# Altium PCB PCB1.PcbDoc
Units mil, origin at the board's own origin, x right, y up, seen from the top; angles counter-clockwise.
Board outline 2040 x 2465 mil, 2 copper layers (Top Layer, Bottom Layer); 48 components, 35 nets, 139 pads, 13 vias.
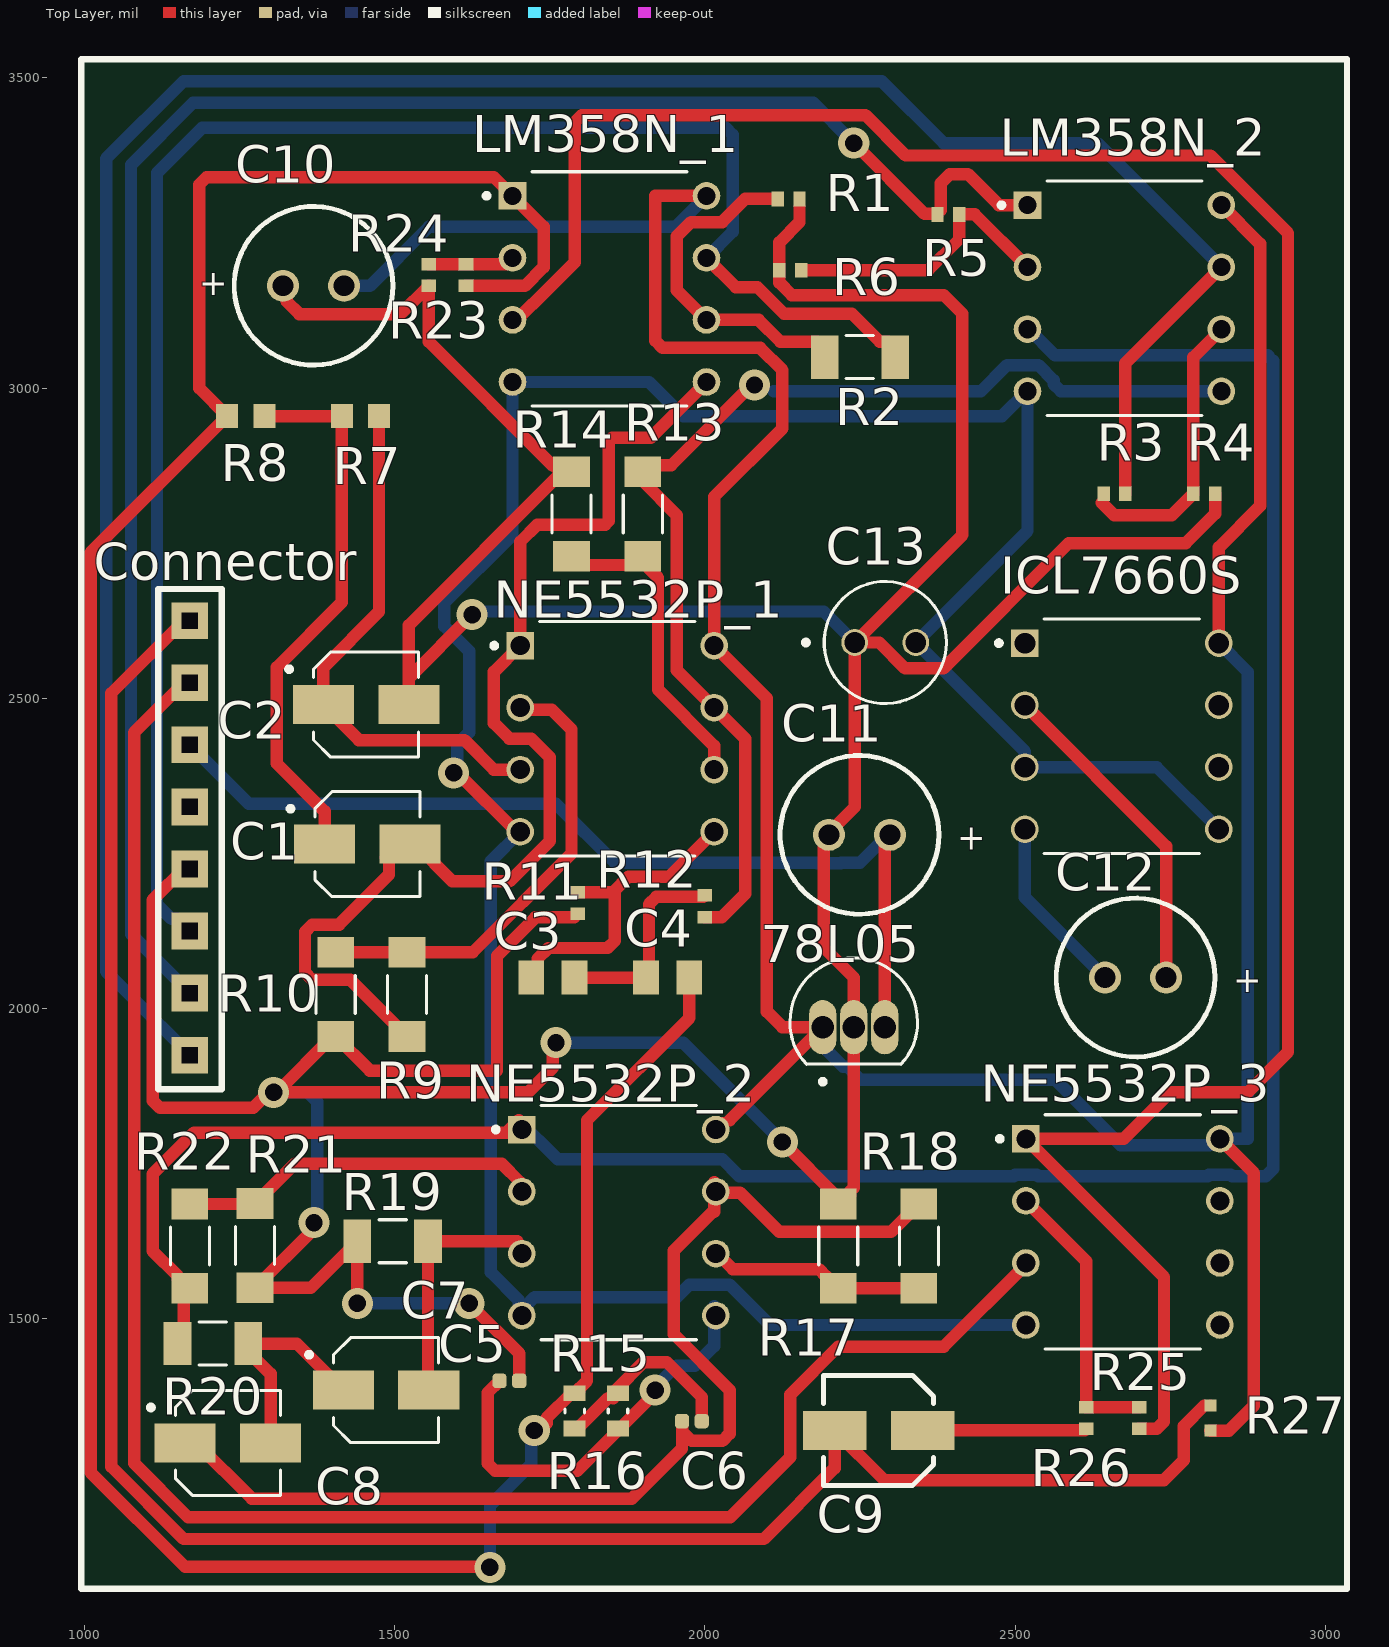
[diagram p0: Top Layer view]
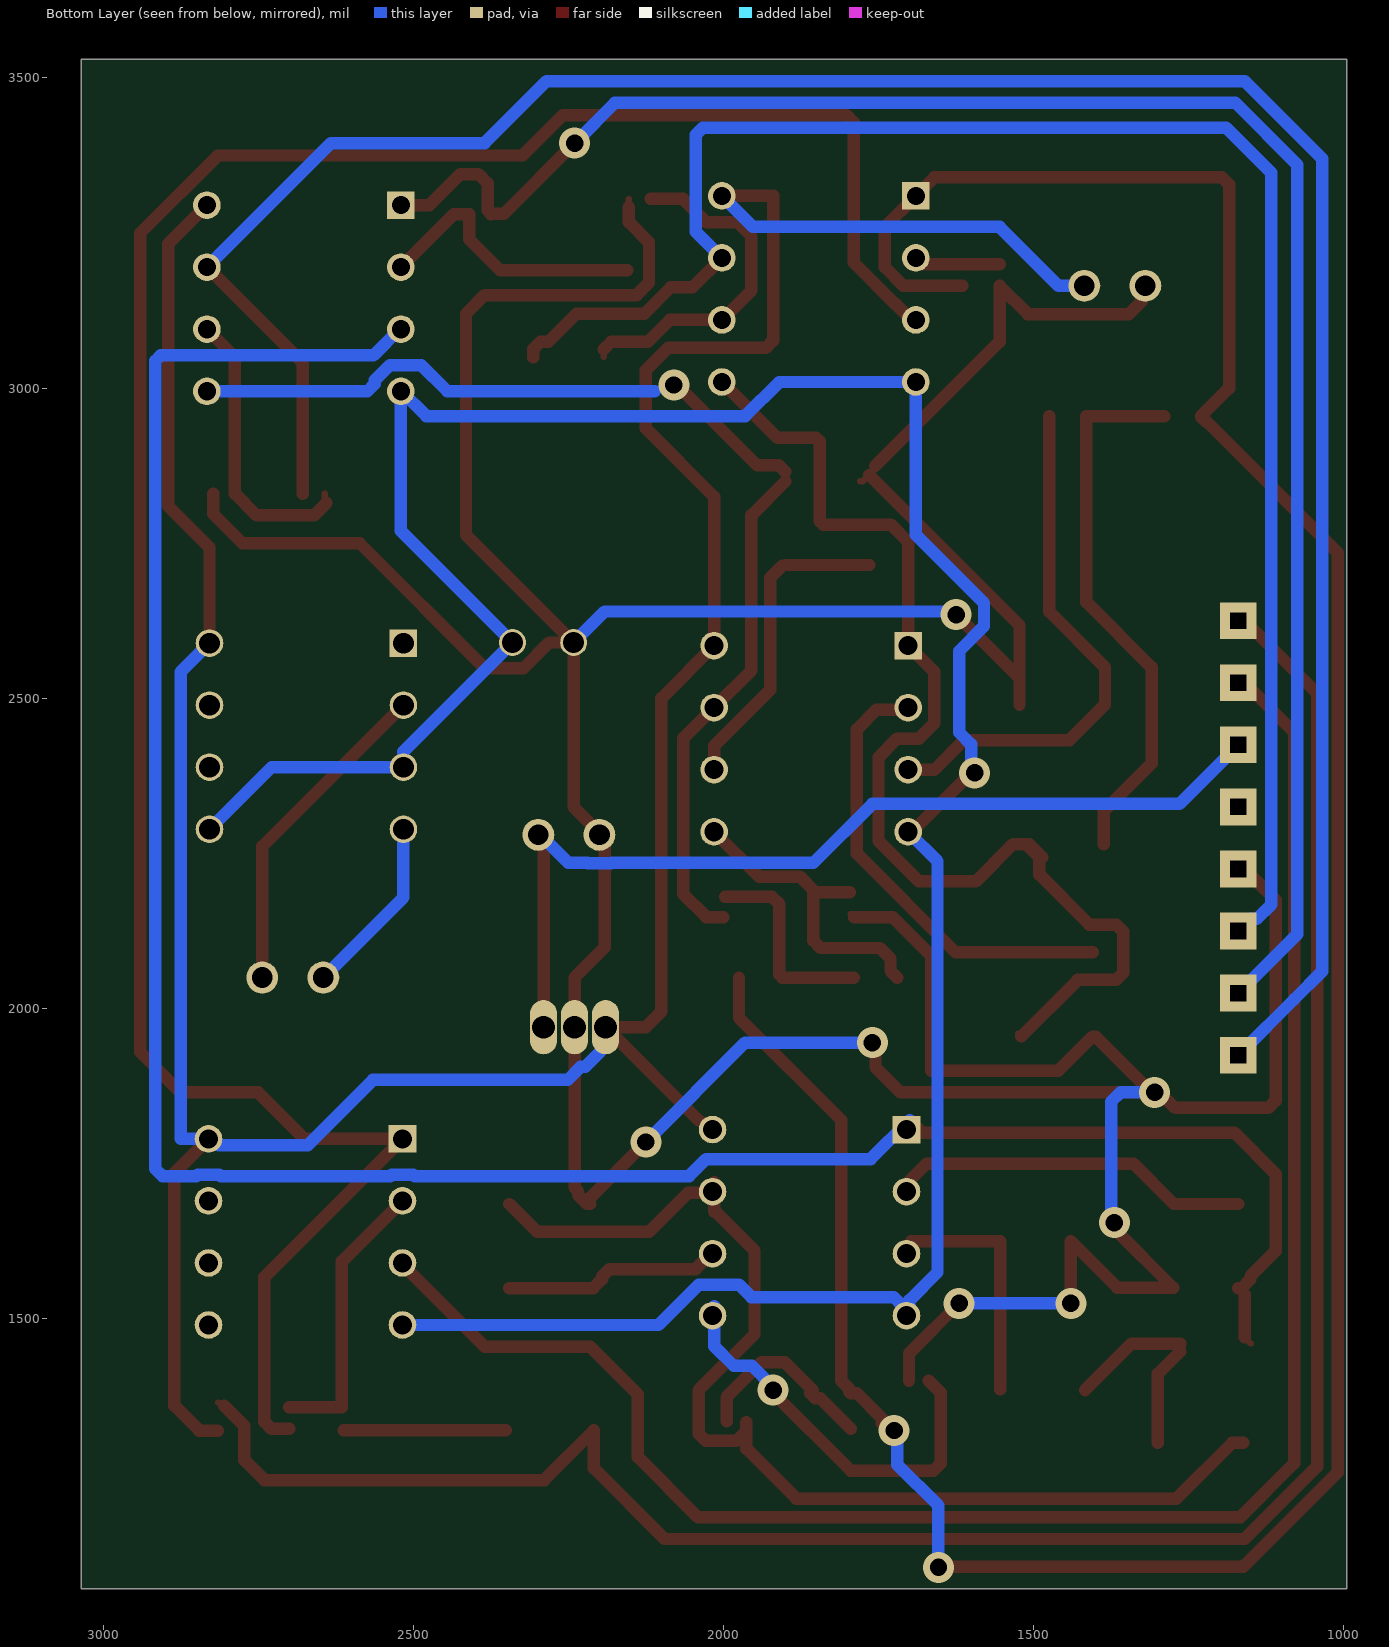
[diagram p1: Bottom Layer view, seen from below]

## Layer stack, top to bottom
Top Solder: solder mask 0.4, Solder Resist, Dk 3.5
Top Layer: signal copper 1.4
Dielectric 1: dielectric 12.6, FR-4, Dk 4.8
Bottom Layer: signal copper 1.4
Bottom Solder: solder mask 0.4, Solder Resist, Dk 3.5

## Board outline
995,1065 3035,1065 3035,3530 995,3530

## Design rules (kind name [scope] priority, off if disabled: settings)
Clearance [All] p1: gap=10 ignorepadtopadclearanceinfootprint=FALSE except(0: Arc-Hole Track-Hole SMDPad-Hole THPad-Hole Via-Hole Fill-Hole Poly-Hole Region-Hole Text-Hole; 6.2: THPad-THPad; 8: SMDPad-SMDPad)
MinimumSolderMaskSliver [All] p1: minsoldermaskwidth=0.6
PolygonConnect [All] p1: connectstyle=Relief reliefconductorwidth=10 reliefentries=4 polygonreliefangle="90 Angle" airgapwidth=10
RoutingVias [All] p1: holewidth=28 width=50 viastyle="Through Hole" minholewidth=28 minwidth=50 maxholewidth=28 maxwidth=50
SilkToSilkClearance [All] p1: silktosilkclearance=0
SilkToSolderMaskClearance [IsPad] p1: minsilkscreentomaskgap=6 clearancetoexposedcopper=TRUE
SolderMaskExpansion [All] p1: expansion=4 istentingtop=FALSE
Width [All] p1: maxlimit=30 minlimit=10 preferedwidth=10 minimp=50.000000 maximp=50.000000 favimp=50.000000
27 further rules are at their usual default settings.

## Components (designator, comment, footprint, x,y, rotation, side; value= is the part's Value field where it differs from the comment)
78L05 "" 78L05 2190,1970 r0 top
C1 "2.2u" 2.2u#1 1691.1,2270 r0 top
C2 "2.2u" 2.2u#1 1688.9,2495 r0 top
C3 "4.7n" 4.7n 1750,2050 r0 top
C4 "4.7n" 4.7n 1935,2050 r0 top
C5 "3.3n" 3.3n 1685,1400 r0 top
C6 "3.3n" 3.3n 1979.06,1335 r0 top
C7 "2.2u" 2.2u#1 1721.1,1390 r0 top
C8 "2.2u" 2.2u#1 1466.1,1305 r0 top
C9 "1u" 1u 2275,1320 r0 top
C10 "470U" 470u 1418.43,3165 r0 top
C11 "2.2u" 2.2u#2 2298.43,2280 r0 top
C12 "470U" 470u 2743.43,2050 r0 top
C13 "10U" 10u 2241.57,2590 r0 top
Connector "" Connector 1170,1880 r0 top
ICL7660S "" ICL7660S 2665,2435 r0 top
LM358N_1 "" LM358N 2186.3,3145 r0 top
LM358N_2 "" LM358N 3016.3,3130 r0 top
NE5532P_1 "" NE5532P 14423.7,-210 r0 top
NE5532P_2 "" NE5532P 14426.3,-990 r0 top
NE5532P_3 "" NE5532P 15238.7,-1005 r0 top
R1 "10k" 10k 2135,3305 r0 top
R2 "470k" 470k 2255,3050 r0 top
R3 "100k" 100k 2660,2830 r0 top
R4 "10k" 10k 2805,2830 r0 top
R5 "100k" 100k 2392.2,3280 r0 top
R6 "10k" 10k 2137.52,3190 r0 top
R7 "270" 270 1409.92,2120 r0 top
R8 "270" 270 1224.92,2120 r0 top
R9 "5.1k" 5.1k 8205,18822.91 r90 top
R10 "5.1k" 5.1k 8090,18822.91 r90 top
R11 "10k" 10k 1795,2170 r90 top
R12 "10k" 10k 2000,2165 r90 top
R13 "5.1k" 5.1k 8585,19597.09 r90 top
R14 "5.1k" 5.1k 8470,19597.09 r90 top
R15 "20k" 20k 12365,27781.46 r90 top
R16 "20k" 20k 12295,27781.46 r90 top
R17 "5.1k" 5.1k 8900,18417.09 r90 top
R18 "5.1k" 5.1k 9030,18417.09 r90 top
R19 "220" 220 -16838.11,33190 r0 top
R20 "220" 220 -17128.11,33025 r0 top
R21 "5.1k" 5.1k 7960,18417.91 r90 top
R22 "5.1k" 5.1k 7855,18417.09 r90 top
R23 "10k" 10k 1555,3182.52 r90 top
R24 "100k" 100k 1615,3182.2 r90 top
R25 "10k" 10k 2700,1340 r90 top
R26 "10k" 10k 2615,1340 r90 top
R27 "3.3k" 3.3k 2809.84,1345 r90 top

## Footprints (in the part's own frame and the unit in brackets; to place one, negate y for a bottom-side part, rotate by r counter-clockwise, add the part's x,y. Pads: shape width x height; smd on the part's side, far side on the other; paste and mask are expansions set on the pad)
1u [mm]
  rect 2.6x1.6 smd paste+0 mask+0.102: 1(1.927,0) 2(-1.673,0)
  silkscreen extent -2.12,-2.25 2.38,2.25
2.2u#1 [mm]
  rect 2.5x1.6 smd: 1(-7.719,-0.127) 2(-4.219,-0.127)
  silkscreen extent -9.22,-2.28 -3.82,2.02, body extent -8.47,-2.28 -3.47,2.02, height 5.4
2.2u#2 [mm]
  round 1.308 hole 0.85 mask+0.102: 1(0,0) 2(-2.5,0)
  silkscreen extent -4.5,-3.25 2,3.25, body extent -4.39,-3.15 1.89,3.14, height 10.89
3.3k [mm]
  rect 0.475x0.5 smd: 1(-0.639,-0.127) 2(0.385,-0.127)
3.3n [mm]
  rrect53% 0.59x0.6 smd paste+0 mask+0.102: 1(-0.405,0) 2(0.405,0)
  body extent -0.5,-0.25 0.5,0.25, height 0.55
4.7n [mm]
  rect 1.05x1.38 smd: 1(-0.761,0) 2(1.015,0)
  body extent -0.87,-0.63 1.13,0.63, height 0.7
5.1k [mm]
  rect 1.25x1.5 smd: 1(-428.445,169.799) 2(-424.995,169.799)
  silkscreen extent -427.5,169 -425.94,170.6
10k [mm]
  rect 0.51x0.6 smd mask+0.05: 1(-0.445,0) 2(0.445,0)
  body extent -0.5,-0.25 0.5,0.25, height 0.4
10u [mm]
  round 1.1 hole 0.85: 1(0,0) 2(2.5,0)
  silkscreen extent -2.1,-2.5 3.75,2.5, body extent -1.25,-2.5 3.75,2.5, height 11
20k [mm]
  rect 0.65x0.9 smd: 1(-672.047,266.827) 2(-670.597,266.827)
  silkscreen extent -671.4,266.43 -671.24,267.23
78L05 [mm]
  oval 1.11x2.22 hole 0.93: 1(0,0) 2(1.27,0) 3(2.54,0)
  silkscreen extent -1.34,-2.33 3.88,2.84, body extent -1.14,-1.33 3.68,2.35, height 7.35
100k [mm]
  rect 0.51x0.6 smd: 1(-0.437,0) 2(0.453,0)
  body extent -0.49,-0.25 0.51,0.25, height 0.4
220 [mm]
  rect 1.13x1.77 smd paste+0 mask+0.102: 1(464.264,-801.751) 2(467.154,-801.751)
  silkscreen extent 465.15,-802.63 466.27,-800.87, body extent 464.11,-802.55 467.31,-800.95, height 0.65
270 [mm]
  rect 0.9x0.97 smd paste+0 mask+0.102: 1(0.129,21.209) 2(1.649,21.209)
  body extent 0.11,20.81 1.66,21.61, height 0.55
470k [mm]
  rect 1.13x1.77 smd paste+0 mask+0.102: 1(-1.572,0) 2(1.318,0)
  silkscreen extent -0.69,-0.88 0.43,0.88, body extent -1.73,-0.8 1.47,0.8, height 0.65
470u [mm]
  round 1.308 hole 0.85 mask+0.102: 1(0,0) 2(-2.5,0)
  silkscreen extent -4.5,-3.25 2,3.25, body extent -4.39,-3.15 1.89,3.14, height 10.89
Connector [mm]
  rect 1.5x1.5 hole 0.66 square: 1(0,18.923) 2(0,16.383) 3(0,13.843) 4(0,11.303) 5(0,8.763) 6(0,6.223) 7(0,3.683) 8(0,1.143)
  silkscreen extent -1.3,-0.25 1.3,20.22
ICL7660S [mm]
  rect 1.13x1.13 / inner round 1.13 / far side rect 1.13x1.13 hole 0.85: 1(-3.789,3.912)
  round 1.13 hole 0.85: 2(-3.789,1.372) 3(-3.789,-1.168) 4(-3.789,-3.708) 5(4.151,-3.708) 6(4.151,-1.168) 7(4.151,1.372) 8(4.151,3.912)
  silkscreen extent -4.95,-4.69 3.36,4.9, body extent -3.97,-4.69 4.33,4.9, height 5.08
LM358N [mm]
  rect 1.13x1.13 / inner round 1.13 / far side rect 1.13x1.13 hole 0.74: 1(-12.606,4.191)
  round 1.13 hole 0.74: 2(-12.606,1.651) 3(-12.606,-0.889) 4(-12.606,-3.429) 5(-4.666,-3.429) 6(-4.666,-0.889) 7(-4.666,1.651) 8(-4.666,4.191)
  silkscreen extent -13.77,-4.41 -5.46,5.18, body extent -12.79,-4.41 -4.48,5.18, height 5.08
NE5532P [mm]
  rect 1.13x1.13 / inner round 1.13 / far side rect 1.13x1.13 hole 0.78: 1(-323.121,70.993)
  round 1.13 hole 0.78: 2(-323.121,68.453) 3(-323.121,65.913) 4(-323.121,63.373) 5(-315.181,63.373) 6(-315.181,65.913) 7(-315.181,68.453) 8(-315.181,70.993)
  silkscreen extent -324.29,62.39 -315.98,71.98, body extent -323.3,62.39 -315,71.98, height 5.08

## Part data
78L05: library part 78L05
Connector: library part Connector
ICL7660S: library part ICL7660S
LM358N_1 LM358N_2: library part LM358N
NE5532P_1 NE5532P_2 NE5532P_3: library part NE5532P

## Via types
v1: diameter 50, hole 28, Top Layer to Bottom Layer, 13 vias

## Nets (pads, with @x,y where several pads share a name; then routed paths per layer and width w, separated by ;. In a path a pad name is that pad's centre, name@x,y a point inside that pad or via, vN(x,y) a via of type N, cw(c..) or ccw(c..) an arc to the next point about the centre after c; other vN are vias at no path point)
+VCC: 78L05.1 C10.1 ICL7660S.8 LM358N_1.8 LM358N_2.8 NE5532P_1.8 NE5532P_2.8 NE5532P_3.8 R27.1 | length 5540.5
  Top Layer w10: NE5532P_2.8@2015,1820 2040,1820
  Top Layer w20: LM358N_1.8 1920,3310 1920,3076.72 1931.72,3065 2089.14,3065 2125,3029.14 2125,2935 2015,2825 NE5532P_1.8 2100,2500 2100,1995 2125,1970 78L05.1 2040,1820 ; R27.1 2844.84,1319.84 2885,1360 2885,1735 NE5532P_3.8 ; ICL7660S.8 2828.43,2743.43 2895,2810 2895,3232.6 LM358N_2.8
  Bottom Layer w10: 78L05.1 2190,1941.04 78L05.1@2198.15,1932.89
  Bottom Layer w20: C10.1 1460,3165 1555,3260 1952.6,3260 LM358N_1.8 ; 78L05.1@2198.15,1932.89 2198.15,1930.81 2222.66,1906.3 2229.74,1906.3 2251.04,1885 2565,1885 2670,1780 2813.37,1780 2823.37,1790 2875,1790 2875,2542.46 ICL7660S.8
-VCC: C13.2 ICL7660S.3 ICL7660S.5 LM358N_1.4 LM358N_2.4 NE5532P_1.4 NE5532P_2.4 NE5532P_3.4 | length 4485.9
  Top Layer w20: v1(1595,2380) 1601.2,2380 1696.2,2285 NE5532P_1.4
  Bottom Layer w10: NE5532P_2.4@1702.4,1520 NE5532P_2.4@1710.5,1520 ; LM358N_2.4@2518.96,2995 LM358N_2.4
  Bottom Layer w20: v1(1595,2380) 1600.74,2385.74 1600.74,2425.74 1620,2445 1620,2576.36 1580,2616.36 1580,2653.64 1690,2763.64 LM358N_1.4 1910,3010 1965,2955 2478.96,2955 LM358N_2.4@2518.96,2995 ; NE5532P_2.4@1700,1520 1700.31,1520.31 1700.31,1529.69 1655,1575 1655,2237.6 NE5532P_1.4 ; NE5532P_2.4@1710.5,1520 1725.5,1535 1955,1535 1975,1555 2039.74,1555 2104.74,1490 NE5532P_3.4 ; LM358N_2.4 2520,2770 C13.2 2515.83,2414.17 ICL7660S.3 2728.43,2389.03 ICL7660S.5
Amp_Out: C4.2 LM358N_1.1 R8.1 R16.2 R24.1 | length 4778.1
  Top Layer w20: R24.1 1710,3165 1740,3195 1740,3260 LM358N_1.1 1660,3340 1196.72,3340 1185,3328.28 1185,3000 R8.1 1230,2953.62 1222.28,2945.91 1220.91,2945.91 1010,2735 1010,1252.5 1162.5,1100 1652.68,1100 v1(1653.4,1099.28) ; v1(1725,1320) 1733.12,1320 1745,1331.88 1745,1340 R16.2@1785,1380 ; R16.2 1794.92,1380 1797.72,1382.8 1797.72,1387.72 1810,1400 1810,1820 1974.96,1984.96 C4.2
  Bottom Layer w10: v1(1653.4,1099.28) v1@1653.74,1099.62
  Bottom Layer w20: v1@1653.74,1099.62 1653.74,1198.74 1720,1265 1720,1315 v1(1725,1320)
BandPass_Amp_Out: Connector.7 LM358N_2.1 R5.1 | length 3004.9
  Top Layer w10: R5.1 R5.1@2375,3280.89
  Top Layer w20: v1(2240,3395) 2354.11,3280.89 R5.1@2375,3280.89 ; R5.1 2375,3281.77 2380,3286.77 2380,3330 2395,3345 2423.88,3345 2473.88,3295 LM358N_2.1
  Bottom Layer w10: v1@2236.36,3395 v1(2240,3395)
  Bottom Layer w20: Connector.7@1165,2030 1075,2120 1075,3360 1175,3460 2175,3460 2236.36,3398.64 v1@2236.36,3395
BandPass_Out: LM358N_2.3 NE5532P_2.1 R20.1 R22.1 | length 3916.4
  Top Layer w10: R20.1 R20.1@1160,1470 ; R22.1@1160,1539.17 R22.1
  Top Layer w20: R20.1@1160,1470 R22.1@1160,1539.17 ; R22.1 1165.08,1549.17 1150.47,1563.78 1150.47,1568.7 1110,1609.17 1110,1733.41 1176.59,1800 1680,1800 NE5532P_2.1@1700,1820
  Bottom Layer w10: 2910,3050 2915.86,3044.14
  Bottom Layer w20: NE5532P_2.1@1700,1820 1762.76,1757.24 2028.03,1757.24 2055.27,1730 2497.66,1730 2499.9,1732.24 2534.9,1732.24 2537.14,1730 2810.26,1730 2812.5,1732.24 2847.5,1732.24 2849.74,1730 2904.14,1730 2915.86,1741.72 2915.86,3044.14 ; LM358N_2.3 2522.17,3095 2564.41,3052.76 2907.24,3052.76 2910,3050
GND: 78L05.2 C2.2 C5.2 C10.2 C11.2 C13.1 Connector.5 R1.2 R4.2 R6.1 R10.1 R11.1 R14.2 R17.2 R19.1 R21.1 R23.1 | length 8236.7
  Top Layer w10: v1@1370,1645 v1(1370,1655) ; R10.1@1400.08,1955 R10.1 ; v1@1755,1940 v1(1760,1945) ; 1755.47,2874.53 1755.47,2869.61 1765.03,2860.05 1775.08,2850 R14.2@1780,2850 ; R11.1@1789.42,2146.9 R11.1 ; 2152.52,3291.8 R1.2 ; R17.2 R17.2@2215,1695 ; 78L05.2@2231.85,1938.01 2231.85,1961.85 78L05.2
  Top Layer w20: Connector.5@1165,2230 1110,2175 1110,1851.72 1121.72,1840 1271.88,1840 1296.88,1865 v1(1305,1865) ; C10.2 1326.03,3158.97 1326.03,3139.75 1346.52,3119.25 1509.25,3119.25 R23.1 1555,3075 1755.47,2874.53 ; v1@1370,1645 R21.1 1365,1550 R19.1 v1(1440,1525) ; R10.1@1400.08,1955 1310,1864.92 1714.92,1864.92 1755,1905 v1@1755,1940 ; R10.1 1460,1900 1665,1900 1665,2085 1726.9,2146.9 R11.1@1789.42,2146.9 ; C2.2 1522.8,2532.8 ; v1(1620,1525) 1700.94,1444.06 C5.2 ; v1(1625,2635) 1522.8,2532.8 ; R14.2@1765.03,2860.05 1522.8,2617.82 1522.8,2532.8 ; v1(2125,1785) R17.2@2215,1695 ; 2152.52,3291.8 2152.52,3267.52 2120,3235 R6.1 2120,3170 2140,3150 2385,3150 2415,3120 2415,2763.43 C13.1 ; R17.2 2219.92,1685 2234.53,1699.61 2234.53,1705.85 2240,1711.32 78L05.2 2240,2050 2191.57,2098.43 2191.57,2275 2241.57,2325 C13.1 ; R4.2 2822.52,2797.52 2775,2750 2586.31,2750 2384.65,2548.35 2322.75,2548.35 2281.09,2590 C13.1
  Bottom Layer w10: v1(1370,1655) v1@1375,1660
  Bottom Layer w20: v1(1305,1865) 1360,1865 1375,1850 ; v1@1375,1660 1375,1849.14 ; v1(1440,1525) v1(1620,1525) ; v1(1625,2635) 1630,2640 2191.57,2640 C13.1 ; v1(1760,1945) 1965,1945 v1(2125,1785)
HighPass_Amp_Out: Connector.8 LM358N_2.7 R3.2 | length 3896.6
  Top Layer w20: R3.2 2677.83,3040.24 LM358N_2.7
  Bottom Layer w20: Connector.8@1165,1930 1080,2015 1035,2060 1035,3370 1160,3495 2285,3495 2385,3395 2632.6,3395 LM358N_2.7
HighPass_Out: LM358N_2.5 NE5532P_1.7 R12.1 R13.2 | length 1851.9
  Top Layer w10: R13.2@1900,2850 R13.2@1904.92,2850
  Top Layer w20: R13.2@1900,2850 1955,2795 1955,2545 NE5532P_1.7 2065,2435 2065,2185 2027.48,2147.48 R12.1 ; R13.2 1910.78,2875.78 1945.78,2875.78 2075,3005 v1(2080,3005)
  Bottom Layer w10: v1(2080,3005) 2087.65,2997.35 2108.51,2997.35 2110.86,2995
  Bottom Layer w20: 2110.86,2995 2360,2995 2445,2995 2487.24,3037.24 2537.5,3037.24 2562.24,3012.5 2562.24,3006.72 2573.96,2995 LM358N_2.5
IN+: C9.2 Connector.1 R27.2 | length 3452.2
  Top Layer w10: R27.2@2814.75,1365.16 R27.2@2814.84,1365.16
  Top Layer w20: Connector.1@1165,2630 1043.2,2508.2 1043.2,1261.73 1159.93,1145 2095,1145 2209.13,1259.13 C9.2 2289.13,1240 2740,1240 2772.21,1272.21 2772.21,1327.21 R27.2@2805,1360
IN-: Connector.2 NE5532P_3.3 | length 2996.9
  Top Layer w10: NE5532P_3.3@2517.4,1587.4 NE5532P_3.3
  Top Layer w20: Connector.2@1165,2530 1080,2445 1080,1267.36 1167.36,1180 2040.85,1180 2137.95,1277.1 ; 2137.95,1282.1 2137.95,1377.95 2215,1455 2385,1455 NE5532P_3.3@2517.4,1587.4
INPUT: LM358N_1.3 NE5532P_3.1 R25.1 | length 3991.1
  Top Layer w20: LM358N_1.3 1696.63,3110 1721.63,3135 1722.43,3135 1790,3202.57 1790,3428.28 1801.72,3440 2258.64,3440 2323.64,3375 2815,3375 2940,3250 2940,1930 2875,1865 2750,1865 2675,1790 NE5532P_3.1 2740,1567.4 2740,1334.2 2728.28,1322.48 R25.1
LowPass_Amp_Out: Connector.6 LM358N_1.7 R2.2 | length 2807.4
  Top Layer w20: LM358N_1.7 2049.94,3162.66 2084.92,3162.66 2127.57,3120 2236.89,3120 2282.05,3074.84 2294.65,3074.84 2306.89,3062.6 R2.2
  Bottom Layer w10: 1116.94,2669.28 1120.47,2665.74
  Bottom Layer w20: Connector.6@1159.86,2125.14 1159.86,2135.14 1150.47,2144.53 1140.47,2144.53 1116.94,2168.06 1116.94,2669.28 1116.94,3346.94 1190,3420 2033.28,3420 2045,3408.28 2045,3252.4 LM358N_1.7
LowPass_Out: C1.2 LM358N_1.5 NE5532P_1.1 R9.1 | length 1922.1
  Top Layer w10: R9.1 R9.1@1525,1960 ; C1.2 1533.14,2265 1541.28,2265 C1.2@1567.78,2238.5
  Top Layer w20: C1.2@1485.79,2243.5 1507.28,2265 C1.2@1512.43,2265 ; R9.1 1428.78,2046.22 1367.19,2046.22 1355.47,2057.94 1355.47,2123.72 1367.19,2135.43 1410.43,2135.43 1490.93,2215.93 1490.93,2243.5 C1.2@1512.43,2265 ; C1.2 C1.2@1512.43,2265 ; C1.2@1533.14,2265 1593.14,2205 1685,2205 1750.16,2270.16 1750.16,2404.84 1720,2435 1685,2435 1660,2460 1660,2542.6 NE5532P_1.1 1702.4,2752.4 1730,2780 1839.14,2780 1845,2785.86 1845,2914.14 1850.86,2920 1912.6,2920 LM358N_1.5
NetC1_1: C1.1 R7.1 R8.2 | length 890.6
  Top Layer w20: R8.2 R7.1 1415,2655 1310,2550 1310,2395 1387.2,2317.8 C1.1
NetC2_1: C2.1 NE5532P_1.3 R7.2 | length 863.1
  Top Layer w20: R7.2 1474.84,2639.84 1385,2550 C2.1 1442.25,2432.75 1612.25,2432.75 1660,2385 NE5532P_1.3
NetC3_1: C3.1 NE5532P_1.5 R11.2 | length 509.7
  Top Layer w10: R11.2 R11.2@1796.77,2187.52
  Top Layer w20: C3.1 1730.71,2060.67 1730.71,2080.45 1747.87,2097.61 1843.28,2097.61 1855,2109.33 1855,2187.52 ; R11.2@1796.77,2187.52 1851.94,2187.52 1876.98,2212.56 1942.56,2212.56 NE5532P_1.5
NetC3_2: C3.2 C4.1 R12.2 | length 327.8
  Top Layer w10: R12.2@1995,2177.52 1997.48,2180 R12.2
  Top Layer w20: C3.2 C4.1 ; C4.1@1910,2054.96 1910,2168.28 1921.72,2180 R12.2@1997.48,2180
NetC5_1: C5.1 NE5532P_2.5 R15.1 | length 664
  Top Layer w20: C5.1 1650,1380.94 1650,1266.72 1661.72,1255 1794.55,1255 1920,1380.45 v1(1920,1385)
  Bottom Layer w10: v1(1920,1385) v1@1920,1390
  Bottom Layer w20: v1@1920,1390 1954.26,1424.26 1983.4,1424.26 2015,1455.86 NE5532P_2.5@2015,1520
NetC6_2: C6.2 R15.2 R16.1 | length 313.9
  Top Layer w10: R16.1 R16.1@1794.92,1322.91 ; R15.2@1844.21,1372.2 R15.2@1852.2,1372.2
  Top Layer w20: R16.1@1794.92,1322.91 R15.2@1844.21,1372.2 ; R15.2@1852.2,1372.2 R15.2 ; R15.2@1855.68,1384.32 1901.36,1430 1938.64,1430 1995,1373.64 C6.2
NetC7_1: C7.1 C8.2 R20.2 | length 359.5
  Top Layer w10: R20.2@1263.78,1447.4 R20.2
  Top Layer w20: R20.2@1263.78,1447.4 1300,1411.18 C8.2 ; R20.2 1342.2,1460 C7.1
NetC7_2: C7.2 NE5532P_2.3 R19.2 | length 391.2
  Top Layer w10: C7.2@1553.78,1386.22 C7.2 ; NE5532P_2.3@1697.4,1625 NE5532P_2.3@1702.4,1620
  Top Layer w20: C7.2@1553.78,1386.22 R19.2 NE5532P_2.3@1697.4,1625
NetC9_1: C9.1 R26.1 | length 265.2
  Top Layer w10: R26.1@2612.52,1320 R26.1
  Top Layer w20: C9.1 R26.1@2612.52,1320
NetC12_1: C12.1 ICL7660S.2 | length 533.3
  Top Layer w20: ICL7660S.2 2743.43,2261.43 C12.1
NetC12_2: C12.2 ICL7660S.4 | length 292.5
  Bottom Layer w20: ICL7660S.4 2515.83,2179.17 C12.2
NetLM358N_1_2: LM358N_1.2 R23.2 R24.2 | length 139.1
  Top Layer w10: LM358N_1.2@1680.04,3200.04 LM358N_1.2
  Top Layer w20: R23.2 LM358N_1.2@1680.04,3200.04
NetLM358N_1_6: LM358N_1.6 R1.1 R2.1 | length 564.8
  Top Layer w10: R2.1 R2.1@2193.11,3062.6
  Top Layer w20: R1.1 2065,3305 2027.76,3267.76 1977.76,3267.76 1955,3245 1955,3157.6 LM358N_1.6 2086.57,3110 2121.73,3074.84 2180.87,3074.84 R2.1@2193.11,3062.6
NetLM358N_2_2: LM358N_2.2 R5.2 R6.2 | length 460.9
  Top Layer w20: R6.2 2360,3190 2410.04,3240.04 R5.2 2435,3280 LM358N_2.2
NetLM358N_2_6: LM358N_2.6 R3.1 R4.1 | length 461.7
  Top Layer w10: R3.1@2642.8,2822.2 R3.1
  Top Layer w20: 2640,2815 2660,2795 2752.48,2795 R4.1 2787.48,3049.88 LM358N_2.6
NetNE5532P_1_2: NE5532P_1.2 R9.2 R10.2 | length 743
  Top Layer w20: R10.2 R9.2 1625.83,2090.83 1785,2250 1785,2450 1753.14,2481.86 1705.54,2481.86 NE5532P_1.2
NetNE5532P_1_6: NE5532P_1.6 R13.1 R14.1 | length 515
  Top Layer w10: R13.1@1899.17,2715 1900,2714.17 R13.1@1904.92,2714.17
  Top Layer w20: R14.1@1765,2715 R13.1@1899.17,2715 ; R13.1@1904.92,2714.17 1924.53,2694.57 1924.53,2514 2015,2423.53 NE5532P_1.6
NetNE5532P_2_2: NE5532P_2.2 R21.2 R22.2 | length 571.8
  Top Layer w10: R21.2@1274.17,1685 R21.2
  Top Layer w20: R22.2 R21.2@1274.17,1685 ; R21.2 1339.17,1750 1672.4,1750 NE5532P_2.2@1702.4,1720
NetNE5532P_2_6: NE5532P_2.6 R17.1 R18.1 | length 357.8
  Top Layer w20: NE5532P_2.6@2015,1610 2045,1580 2183.76,1580 2195.47,1568.28 2195.47,1563.78 2210.08,1549.17 R17.1 R18.1
NetNE5532P_3_2: NE5532P_3.2 R25.2 R26.2 | length 457.9
  Top Layer w20: NE5532P_3.2 2615,1592.4 R26.2 R25.2
Out1: C6.1 C8.1 NE5532P_2.7 R18.2 | length 1869.6
  Top Layer w10: 1877.43,1210 1882.43,1210 ; C6.1@1963.11,1325.86 1963.11,1333.19 C6.1 ; NE5532P_2.7@2015,1710 NE5532P_2.7@2021.6,1703.4
  Top Layer w20: C8.1 1179.92,1300 1269.92,1210 1877.43,1210 ; 1882.43,1210 1963.11,1290.68 C6.1@1963.11,1325.86 ; C6.1@1963.11,1333.19 1963.39,1333.19 1963.39,1318.51 1978.71,1303.19 2028.28,1303.19 2040,1314.9 2040,1385 1950,1475 1950,1610.07 2013.8,1673.87 ; 2015,1672.67 2015,1710 NE5532P_2.7@2015,1720 ; NE5532P_2.7@2018.3,1703.4 2021.6,1703.4 2056.6,1703.4 2120,1640 2300,1640 R18.2
V_IN: 78L05.3 C11.1 Connector.3 | length 1520.9
  Top Layer w20: 78L05.3 C11.1@2290,2275
  Bottom Layer w10: 2250,2235 2252.93,2237.93
  Bottom Layer w20: Connector.3 1265,2330 1760,2330 1855,2235 2180.3,2235 2181.05,2234.25 2218.95,2234.25 2219.7,2235 2250,2235 ; 2252.93,2237.93 C11.1@2290,2275
pads on no net: Connector.4 ICL7660S.1 ICL7660S.6 ICL7660S.7 NE5532P_3.5 NE5532P_3.6 NE5532P_3.7

## Silkscreen, mask and mechanical layers (free items; w line width, h text height)
Top Overlay:
  the board outline again, w10

## Text inside footprints (layer, text, board x,y; h text height)
C10: Top Overlay "+" at 1185,3150 h40; Mechanical 13 "+" at 1185,3150 h40
C11: Top Overlay "+" at 2406.69,2256.38 h40; Mechanical 13 "+" at 2406.69,2256.38 h40
C12: Top Overlay "+" at 2851.69,2026.38 h40; Mechanical 13 "+" at 2851.69,2026.38 h40